# EAGLE board Granny Safe (EAGLE 8.4.0)
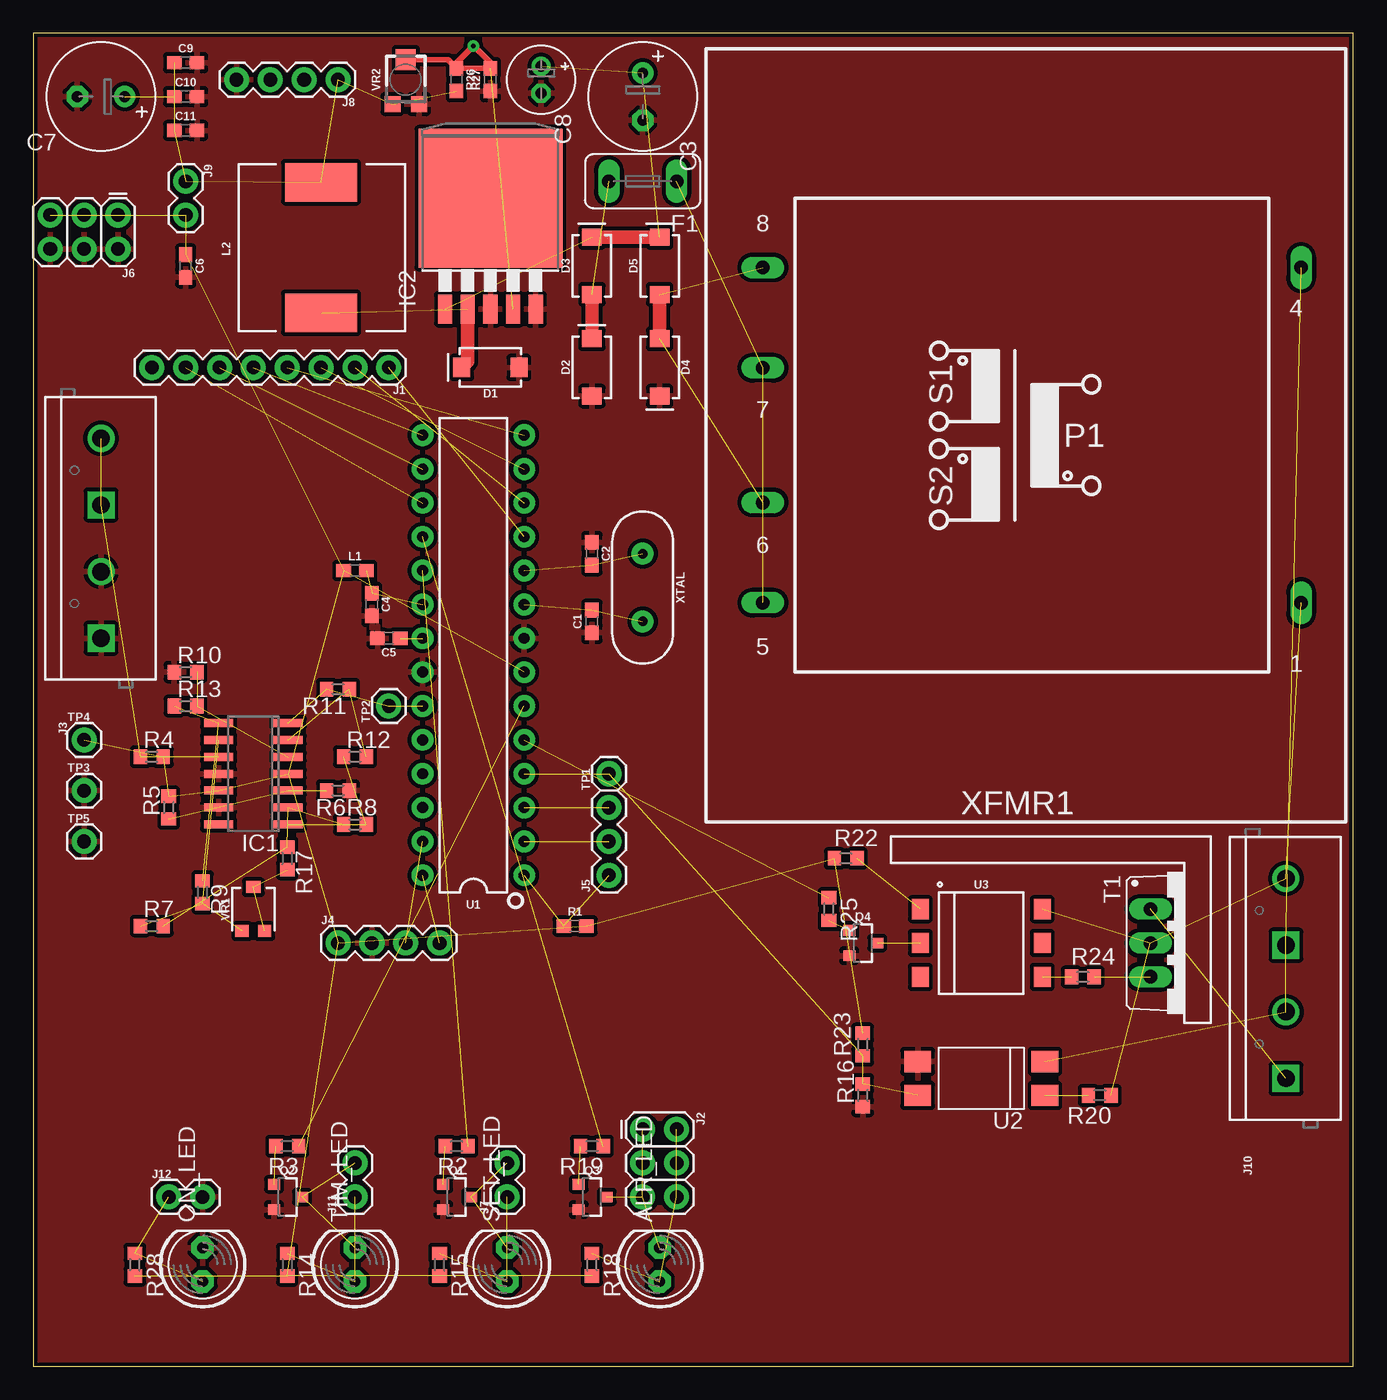
[diagram p0: board, top side]
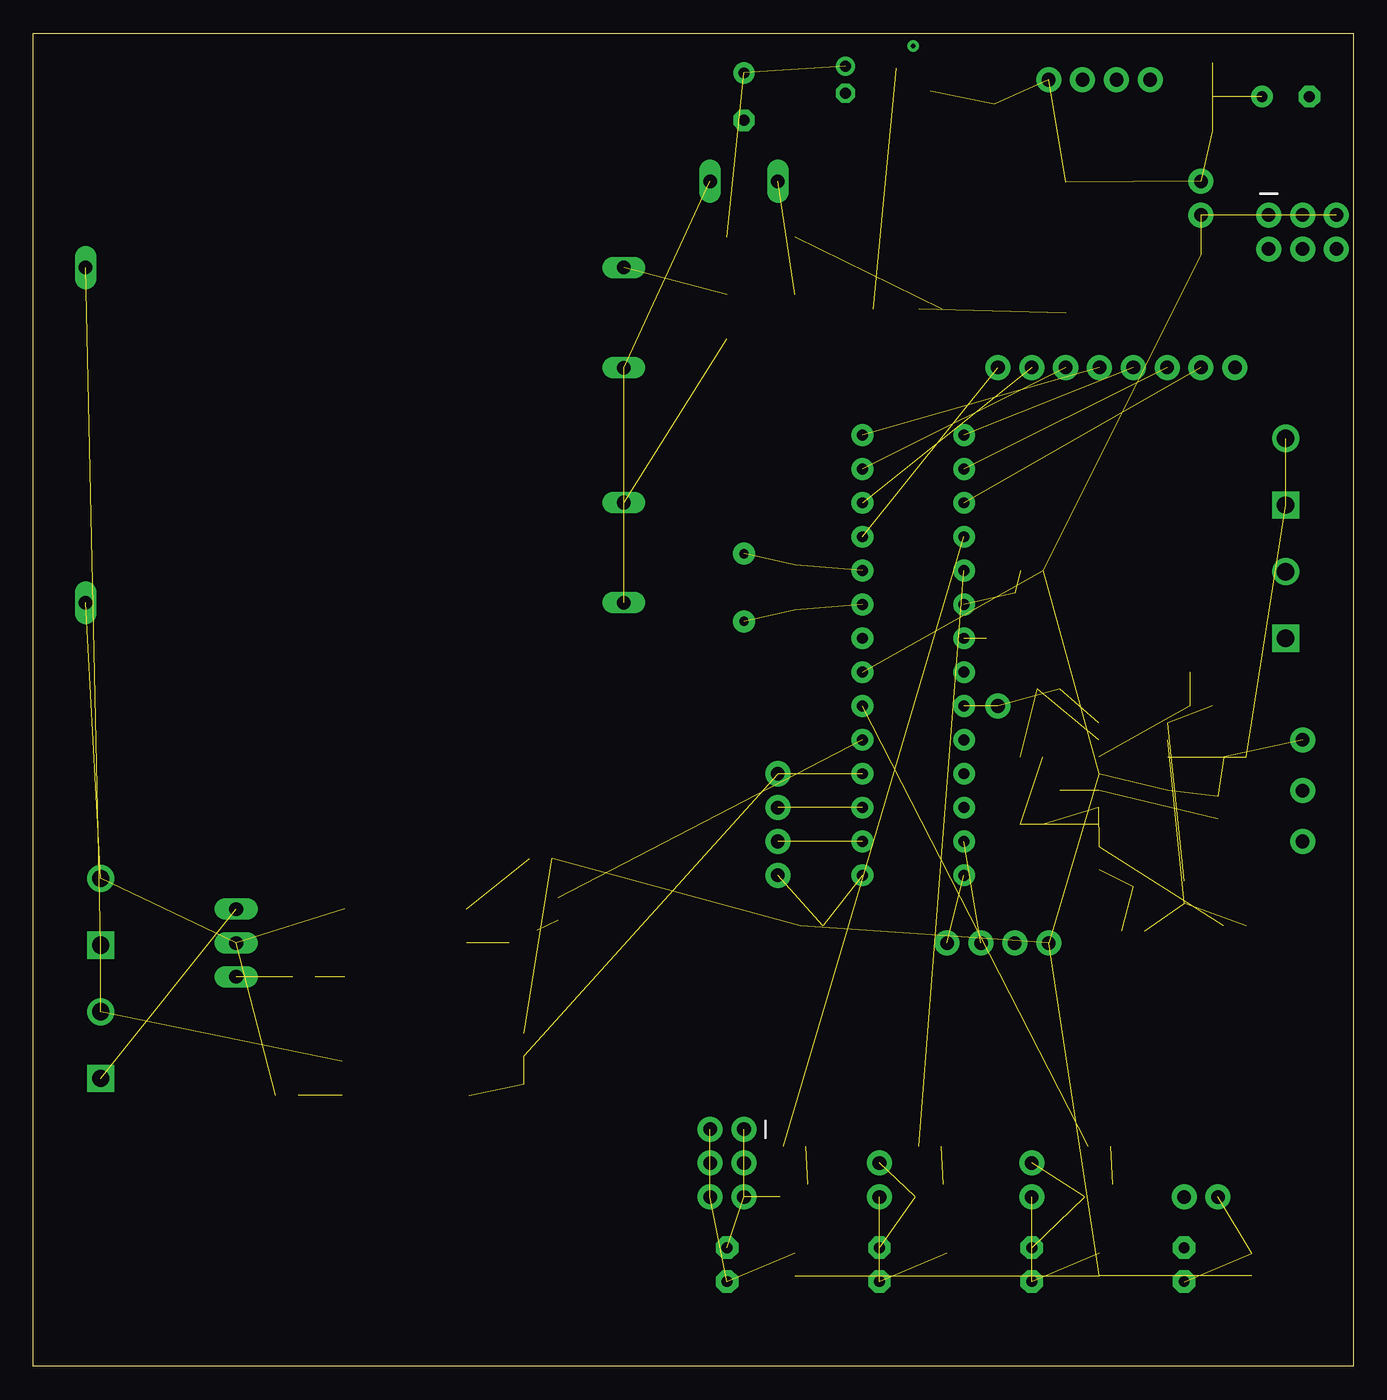
[diagram p1: board, bottom side, seen from below]

Size 99.04 x 100 mm. Coordinates in mm from the lower left corner, seen from the top.
Outline: 0,0 99.04,0 99.04,100 0,100 0,0
Copper layers (1*16): Top 0.035mm / dielectric 1.5mm / Bottom 0.035mm
Design rules "SparkFun *": minimum track width 8mil, minimum drill 20mil, track to track 8mil, track to pad 8mil, pad to pad 8mil, via to via 8mil, smd to smd 8mil, copper to edge 10mil, drill to drill 8mil, minimum pad ring 12mil, minimum via ring 10mil, stop-mask expansion 4mil, vias tented up to drill 25mil, thermal gap 12mil

## Footprints (pad centres in the part's own frame; a part is rotated, then mirrored left to right if it is on the bottom)
LED5MM = drill 0.813 pad 1.676 octagon: A -1.27,0; K 1.27,0
0603 = smd 1.1 x 1: 1 -0.85,0; 2 0.85,0
E3,5-8 = drill 0.813 pad 1.6: + -1.778,0 | drill 0.813 pad 1.6 octagon: - 1.778,0
E2-5 = drill 0.813 pad 1.422: + -1.016,0 | drill 0.813 pad 1.422 octagon: - 1.016,0
SMA-DIODE = smd 1.27 x 1.47: A -2.15,0; C 2.15,0
TE5 = drill 1.016 long: 1 -2.54,0; 2 2.54,0
STAND-OFF = hole 3.302: 0,0
SO14 = smd 0.6 x 2.2: 1 -3.81,-2.6; 2 -2.54,-2.6; 3 -1.27,-2.6; 4 0,-2.6; 5 1.27,-2.6; 6 2.54,-2.6; 7 3.81,-2.6; 8 3.81,2.6; 9 2.54,2.6; 10 1.27,2.6; 11 0,2.6; 12 -1.27,2.6; 13 -2.54,2.6; 14 -3.81,2.6
TO263-5 = smd 1.067 x 2.159: 1 -3.404,-5.791; 2 -1.702,-5.791; 3 0,-5.791; 4 1.702,-5.791; 5 3.404,-5.791 | smd 10.8 x 10.41: 6 0,2.54
1X08 = drill 1.016 pad 1.88: 1 0,0; 2 2.54,0; 3 5.08,0; 4 7.62,0; 5 10.16,0; 6 12.7,0; 7 15.24,0; 8 17.78,0
2X3 = drill 1.016 pad 1.88: 1 0,0; 2 0,2.54; 3 2.54,0; 4 2.54,2.54; 5 5.08,0; 6 5.08,2.54
SCREWTERMINAL-5MM-2 = drill 1.3 pad 2.032 square: 1 0,0; 3 10,0 | drill 1.3 pad 2.032: 2 5,0; 4 15,0
1X04 = drill 1.016 pad 1.88: 1 0,0; 2 2.54,0; 3 5.08,0; 4 7.62,0
1X03 = drill 1.016 pad 1.88: 1 0,0; 2 2.54,0; 3 5.08,0
1X02 = drill 1.016 pad 1.88: 1 0,0; 2 2.54,0
CR75 = smd 2.9 x 5.4: P$1 -4.8,0; P$2 5,0
PCB_MOUNT_SPEAKER = drill 1.143 square: + -7.62,0; - 7.62,0
SOT23-3 = smd 0.8 x 0.9: 1 -0.95,-1; 2 0.95,-1; 3 0,1.1
R0603 = smd 1 x 1.1: 1 -0.85,0; 2 0.85,0
AXIAL-0.3 = drill 0.9 pad 1.88: P$1 -3.81,0; P$2 3.81,0
TO220BV = drill 1.016 long: G 2.54,-2.54; T1 -2.54,-2.54; T2 0,-2.54
1X01 = drill 1.016 pad 1.88: 1 0,0
DIP28 = drill 0.813 pad 1.626: 1 -16.51,-3.81; 2 -13.97,-3.81; 3 -11.43,-3.81; 4 -8.89,-3.81; 5 -6.35,-3.81; 6 -3.81,-3.81; 7 -1.27,-3.81; 8 1.27,-3.81; 9 3.81,-3.81; 10 6.35,-3.81; 11 8.89,-3.81; 12 11.43,-3.81; 13 13.97,-3.81; 14 16.51,-3.81; 15 16.51,3.81; 16 13.97,3.81; 17 11.43,3.81; 18 8.89,3.81; 19 6.35,3.81; 20 3.81,3.81; 21 1.27,3.81; 22 -1.27,3.81; 23 -3.81,3.81; 24 -6.35,3.81; 25 -8.89,3.81; 26 -11.43,3.81; 27 -13.97,3.81; 28 -16.51,3.81
DIL4-SMD = smd 1.6 x 2: 1 -1.27,-4.77; 2 1.27,-4.77; 3 1.27,4.77; 4 -1.27,4.77
DIP8SMD = smd 1.524 x 1.27: 1 -2.54,-4.572; 2 0,-4.572; 3 2.54,-4.572; 4 2.54,4.572; 5 0,4.572; 6 -2.54,4.572
TRIMPOT-SMD-3MM-CLOSED = smd 1 x 0.9: 1 -0.85,-1.65; 3 0.85,-1.65 | smd 1.1 x 0.9: 2 0,1.65
TRIMPOT-SMD-TC33X = smd 1.2 x 1.2: 1 -1,-1.825; 3 1,-1.825 | smd 1.5 x 1.6: 2 0,1.5
EE20-2 = drill 1.016 long: 1 -17.653,12.573; 4 -17.653,-12.573; 5 22.733,12.573; 6 22.733,5.055; 7 22.733,-5.055; 8 22.733,-12.573
HC49US = drill 0.7 pad 1.651: 1 -2.54,0; 2 2.54,0

## Placement (x,y rotation side)
ALR_LED  [LED5MM]  46.99,7.62 90 top
C1  22pF  [0603]  41.91,55.88 90 top
C2  22pF  [0603]  41.91,60.96 270 top
C3  470u  [E3,5-8]  45.72,95.25 270 top
C4  0.1uF  [0603]  25.4,57.15 270 top
C5  0.1uF  [0603]  26.67,54.61 180 top
C6  0.1uF  [0603]  11.43,82.55 270 top
C7  470u  [E3,5-8]  5.08,95.25 180 top
C8  100u  [E2-5]  38.1,96.52 270 top
C9  0.1uF  [0603]  11.43,97.79 0 top
C10  100pF  [0603]  11.43,95.25 0 top
C11  1nF  [0603]  11.43,92.71 0 top
D1  [SMA-DIODE]  34.29,74.93 180 top
D2  [SMA-DIODE]  41.91,74.93 90 top
D3  [SMA-DIODE]  41.91,82.55 90 top
D4  [SMA-DIODE]  46.99,74.93 270 top
D5  [SMA-DIODE]  46.99,82.55 90 top
F1  1.5A  [TE5]  45.72,88.9 180 top
H1  STAND-OFF  [STAND-OFF]  -168.91,-1.27 0 top  (outside the outline)
H2  STAND-OFF  [STAND-OFF]  -175.26,-1.27 0 top  (outside the outline)
H3  STAND-OFF  [STAND-OFF]  -181.61,-1.27 0 top  (outside the outline)
H4  STAND-OFF  [STAND-OFF]  -187.96,-1.27 0 top  (outside the outline)
IC1  MCP604SL  [SO14]  16.51,44.45 90 top
IC2  LM2596S  [TO263-5]  34.29,85.09 0 top
J1  3x4 Keypad  [1X08]  26.67,74.93 180 top
J2  FEMALE 2x3  [2X3]  45.72,17.78 270 top
J3  SCREW-4  [SCREWTERMINAL-5MM-2]  5.08,54.61 90 top
J4  i2c_16x2  [1X04]  22.86,31.75 0 top
J5  [1X03]  43.18,36.83 90 top
J6  FEMALE 2x3  [2X3]  6.35,86.36 180 top
J7  [1X02]  35.56,12.7 90 top
J8  RES JUMPER  [1X04]  22.86,96.52 180 top
J9  CKT PWR CONN  [1X02]  11.43,88.9 270 top
J10  SCREW-4  [SCREWTERMINAL-5MM-2]  93.98,21.59 90 top
J11  [1X02]  24.13,12.7 90 top
J12  [1X02]  10.16,12.7 0 top
L1  10uH  [0603]  24.13,59.69 0 top
L2  INDUCTOR  [CR75]  21.59,83.82 90 top
LS1  SPEAKER  [PCB_MOUNT_SPEAKER]  -138.43,15.24 0 top  (outside the outline)
ON_LED  [LED5MM]  12.7,7.62 90 top
Q1  [SOT23-3]  31.75,12.7 270 top
Q2  [SOT23-3]  19.05,12.7 270 top
Q3  [SOT23-3]  41.91,12.7 270 top
Q4  2N3904  [SOT23-3]  62.23,31.75 270 top
R1  10k  [0603]  40.64,33.02 0 top
R2  2k  [R0603]  31.75,16.51 180 top
R3  2k  [R0603]  19.05,16.51 180 top
R4  2.4k  [R0603]  8.89,45.72 0 top
R5  2.4k  [R0603]  10.16,41.91 90 top
R6  100  [R0603]  22.86,43.18 180 top
R7  10k  [R0603]  8.89,33.02 0 top
R8  20k  [R0603]  24.13,40.64 0 top
R9  20k  [R0603]  12.7,35.56 270 top
R10  15k  [R0603]  11.43,52.07 0 top
R11  15k  [R0603]  22.86,50.8 180 top
R12  3k  [R0603]  24.13,45.72 0 top
R13  3k  [R0603]  11.43,49.53 0 top
R14  150  [R0603]  19.05,7.62 270 top
R15  150  [R0603]  30.48,7.62 270 top
R16  1M  [R0603]  62.23,20.32 90 top
R17  5k  [R0603]  19.05,38.1 270 top
R18  150  [R0603]  41.91,7.62 270 top
R19  2k  [R0603]  41.91,16.51 180 top
R20  10k  [R0603]  80.01,20.32 180 top
R22  220  [R0603]  60.96,38.1 0 top
R23  10k  [R0603]  62.23,24.13 90 top
R24  180  [R0603]  78.74,29.21 0 top
R25  2k  [R0603]  59.69,34.29 270 top
R26  3.3k  [0603]  31.75,96.52 270 top
R27  1k  [0603]  34.29,96.52 90 top
R28  150  [R0603]  7.62,7.62 270 top
RTD  [AXIAL-0.3]  -114.3,134.62 0 top  (outside the outline)
SET_LED  [LED5MM]  35.56,7.62 90 top
T1  BT137  [TO220BV]  86.36,31.75 270 top
TIM_LED  [LED5MM]  24.13,7.62 90 top
TP1  [1X01]  43.18,44.45 90 top
TP2  [1X01]  26.67,49.53 90 top
TP3  [1X01]  3.81,43.18 0 top
TP4  [1X01]  3.81,46.99 0 top
TP5  [1X01]  3.81,39.37 0 top
U1  328P  [DIP28]  33.02,53.34 90 top
U2  SFH6206  [DIL4-SMD]  71.12,21.59 90 top
U3  MOC3051  [DIP8SMD]  71.12,31.75 270 top
VR1  10k  [TRIMPOT-SMD-3MM-CLOSED]  16.51,34.29 0 top
VR2  10k  [TRIMPOT-SMD-TC33X]  27.94,96.52 0 top
XFMR1  EE20-2  [EE20-2]  77.47,69.85 180 top
XTAL  16MHz  [HC49US]  45.72,58.42 270 top

## Library data of the parts
ALR_LED C3 C7 C8 ON_LED R2 R3 R14 R15 R18-R20 R22-R25 R28 SET_LED TIM_LED = adafruit
C1 C2 = SparkFun-Capacitors; PROD_ID: CAP-07876
C4-C6 = SparkFun-Capacitors; PROD_ID: CAP-00810
C9 = SparkFun-Capacitors; PROD_ID: CAP-08604
C10 = SparkFun-Capacitors; PROD_ID: CAP-07883
C11 = SparkFun-Capacitors; PROD_ID: CAP-07886
D1-D5 = SparkFun-DiscreteSemi; PROD_ID: DIO-09886
F1 = fuse; OC_FARNELL: unknown; OC_NEWARK: unknown
H1-H4 = SparkFun-Hardware
IC1 = linear
IC2 = national-semiconductor; MF: NATIONAL SEMICONDUCTOR; MPN: LM2596S-ADJ/NOPB; OC_FARNELL: 9494367; OC_NEWARK: 41K3842
J1 = SparkFun-Connectors; PROD_ID: CONN-08438
J2 J6 = SparkFun-Connectors; PROD_ID: CONN-11566
J3 J10 L2 T1 U3 XFMR1 = ece
J4 J8 = SparkFun-Connectors; PROD_ID: CONN-09696
J5 J7 J9 J11 J12 TP1-TP5 = SparkFun-Connectors
L1 = SparkFun-Coils; PROD_ID: NDUC-07874
LS1 = SparkFun-Electromechanical; PROD_ID: COMP-11789; SF_SKU: COM-11089
Q1-Q4 = SparkFun-DiscreteSemi; PROD_ID: TRANS-09116
R1 = SparkFun-Resistors; PROD_ID: RES-00824
R4-R13 R16 R17 = resistor
R26 = SparkFun-Resistors; PROD_ID: RES-07851
R27 = SparkFun-Resistors; PROD_ID: RES-07856
RTD = SparkFun-Resistors; PROD_ID: RES-12183
U1 = SparkFun-IC-Microcontroller; PROD_ID: IC-09136
U2 = optocoupler; MF: VISHAY/TELEFUNKEN; MPN: SFH6206-3; OC_FARNELL: 1469585; OC_NEWARK: 58K2214
VR1 = SparkFun-Resistors; PROD_ID: RES-09285
VR2 = SparkFun-Resistors; PROD_ID: RES-12428
XTAL = SparkFun-Clocks; PROD_ID: XTAL-08181; SF_ID: COM-00536

## Nets
5V: C6.1 IC1.4 IC1.12 J4.1 J6.1 J6.3 J6.5 J9.2 L1.1 R1.2 R4.2 R5.2 R14.2 R15.2 R18.2 R22.1 R23.2 R28.2 TP4.1 U1.7
ADC0: IC1.7 R11.2 TP2.1 U1.23
ALR: R19.1 U1.18
GATE: R25.1 U1.5
GND: C1.1 C2.1 C3.- C4.2 C5.2 C6.2 C7.- C8.- C9.2 C10.2 C11.2 D1.A D2.A D4.C IC1.11 IC1.13 IC2.3 IC2.5 J3.1 J3.2 J4.2 J6.2 J6.4 J6.6 J8.4 J12.2 ON_LED.K Q1.2 Q2.2 Q3.2 Q4.2 R6.1 R10.1 R16.1 R27.1 TP3.1 TP5.1 U1.8 U1.22 U2.3 VR2.3
LINE: J10.4 R20.1 T1.T2 U3.6 XFMR1.1
N$1: C1.2 U1.9 XTAL.2
N$2: C2.2 U1.10 XTAL.1
N$3: J1.7 U1.17
N$5: C5.1 U1.21
N$6: J1.6 U1.16
N$7: J1.5 U1.15
N$8: J1.4 U1.14
N$9: J1.3 U1.13
N$10: J1.2 U1.12
N$11: J1.1 U1.11
N$12: Q1.1 R2.2
N$13: IC1.10 J3.3 J3.4 R4.1
N$14: Q2.1 R3.2
N$15: IC1.3 R5.1 R6.2
N$16: IC1.1 R8.2 R12.1
N$17: J7.1 R15.1 SET_LED.A
N$18: J11.1 R14.1 TIM_LED.A
N$19: J11.2 Q2.3 TIM_LED.K
N$20: J7.2 Q1.3 SET_LED.K
N$21: R17.2 VR1.2 VR1.3
N$22: D2.C D3.A F1.2
N$23: ALR_LED.K J2.1 J2.3 J2.5 Q3.3
N$24: IC1.2 R7.2 R8.1 R17.1
N$25: IC1.8 R9.1 R13.1
N$26: IC1.9 R7.1 R9.2 VR1.1
N$27: IC1.5 R10.2 R13.2
N$28: IC1.6 R11.1 R12.2
N$29: R20.2 U2.1
N$30: R24.2 T1.G
N$31: R22.2 U3.1
N$32: R24.1 U3.4
N$33: IC2.4 R26.1 R27.2 VR2.2
N$34: Q4.3 U3.2
N$35: Q4.1 R25.2
N$36: J12.1 ON_LED.A R28.1
N$37: F1.1 XFMR1.5 XFMR1.7
N$38: C7.+ C9.1 C10.1 C11.1 J8.1 J9.1 L2.P$2 R26.2 VR2.1
N$39: ALR_LED.A J2.2 J2.4 J2.6 R18.1
N$40: Q3.1 R19.2
N$41: D4.A D5.A XFMR1.6 XFMR1.8
N$43: C4.1 L1.2 U1.20
N$46: D1.C IC2.2 L2.P$1
N$51: C3.+ C8.+ D3.C D5.C IC2.1
NEUT: J10.2 J10.3 U2.2 XFMR1.4
PWR: J10.1 T1.T1
RST: J5.1 R1.1 U1.1
RX: J5.2 U1.2
SCL: J4.4 U1.28
SDA: J4.3 U1.27
SET: R2.1 U1.19
T_EN: R3.1 U1.6
TX: J5.3 U1.3
ZERO: R16.2 R23.1 TP1.1 U1.4 U2.4

## Tracks (layer width: path | path; a pad name or v marks a point on that pad's centre or on a via)
5V  (19 unrouted)
ADC0  (3 unrouted)
ALR  (1 unrouted)
GATE  (1 unrouted)
GND
  pour Top (isolate 0.305): 0,100.33 0,0 99.06,0 99.06,100.33
LINE  (4 unrouted)
N$1  (2 unrouted)
N$2  (2 unrouted)
N$3  (1 unrouted)
N$5  (1 unrouted)
N$6  (1 unrouted)
N$7  (1 unrouted)
N$8  (1 unrouted)
N$9  (1 unrouted)
N$10  (1 unrouted)
N$11  (1 unrouted)
N$12  (1 unrouted)
N$13  (3 unrouted)
N$14  (1 unrouted)
N$15  (2 unrouted)
N$16  (2 unrouted)
N$17  (2 unrouted)
N$18  (2 unrouted)
N$19  (2 unrouted)
N$20  (2 unrouted)
N$21  (2 unrouted)
N$22  (1 unrouted)
  Top 1.016: D3.A D2.C
N$23  (4 unrouted)
N$24  (3 unrouted)
N$25  (2 unrouted)
N$26  (3 unrouted)
N$27  (2 unrouted)
N$28  (2 unrouted)
N$29  (1 unrouted)
N$30  (1 unrouted)
N$31  (1 unrouted)
N$32  (1 unrouted)
N$33  (via drill 0.35)  (1 unrouted)
  Top 0.406: R26.1 31.75,97.79 v33.02,99.06 34.29,97.79 R27.2 R26.1 | VR2.2 31.1,98.02 R26.1
N$34  (1 unrouted)
N$35  (1 unrouted)
N$36  (2 unrouted)
N$37  (2 unrouted)
N$38  (8 unrouted)
N$39  (4 unrouted)
N$40  (1 unrouted)
N$41  (2 unrouted)
  Top 1.016: D5.A D4.A
N$43  (2 unrouted)
N$46  (1 unrouted)
  Top 1.016: IC2.2 32.59,75.38 D1.C
N$51  (3 unrouted)
  Top 1.016: D3.C D5.C
NEUT  (3 unrouted)
PWR  (1 unrouted)
RST  (2 unrouted)
RX  (1 unrouted)
SCL  (1 unrouted)
SDA  (1 unrouted)
SET  (1 unrouted)
T_EN  (1 unrouted)
TX  (1 unrouted)
ZERO  (4 unrouted)